# EAGLE board board_old (EAGLE 6.5.0)

Size 49.53 x 49.53 mm. Coordinates in mm from the lower left corner, seen from the top.
Outline: 0,0 49.53,0 49.53,49.53 0,49.53 0,0
Copper layers (1*16): Top 0.035mm / dielectric 1.5mm / Bottom 0.035mm
Design rules "default": minimum track width 10mil, minimum drill 24mil, track to track 8mil, track to pad 8mil, pad to pad 8mil, via to via 8mil, smd to smd 8mil, copper to edge 40mil, drill to drill 8mil, minimum pad ring 10mil, minimum via ring 8mil, stop-mask expansion 4mil, vias tented up to drill 0mil, thermal gap 10mil

## Footprints (pad centres in the part's own frame; a part is rotated, then mirrored left to right if it is on the bottom)
C1206 = smd 1.6 x 1.8: 1 -1.4,0; 2 1.4,0
E2-5 = drill 0.813 pad 1.27: + -1.016,0 | drill 0.813 pad 1.27 octagon: - 1.016,0
E5-10,5 = drill 1.016 pad 2.54: + -2.54,0 | drill 1.016 pad 2.54 octagon: - 2.54,0
E5-13 = drill 1.016 pad 2.54: + -2.54,0 | drill 1.016 pad 2.54 octagon: - 2.54,0
DO41-10 = drill 1.118: A 5.08,0; C -5.08,0
LED-1206 = smd 1.2 x 1.4: A -1.5,0; C 1.5,0
317TS = drill 1.016 long: 1 -2.54,-2.54; 2 0,-2.54; 3 2.54,-2.54
RTRIM3296W = drill 0.61: 1 0,-2.54; 2 0,0; 3 0,2.54
0309/10 = drill 0.813 octagon: 1 -5.08,0; 2 5.08,0
R1206 = smd 1.6 x 1.803: 1 -1.422,0; 2 1.422,0
W237-3E = drill 1.194 long: 1 -5.08,-0.635; 2 0,-0.635; 3 5.08,-0.635
W237-132 = drill 1.194 long: 1 -2.54,-0.635; 2 2.54,-0.635

## Placement (x,y rotation side)
C1  0.1u  [C1206]  17.78,38.1 90 top
C2  10u  [E2-5]  6.35,7.62 90 top
C3  1u  [C1206]  34.29,30.48 90 top
C4  220u  [E5-10,5]  11.43,27.94 270 top
C5  470u  [E5-13]  39.37,41.91 0 top
D1  1N4004  [DO41-10]  25.4,29.21 90 top
D2  [LED-1206]  24.13,44.45 180 top
IC1  [317TS]  38.1,13.97 0 top
R1  5k  [RTRIM3296W]  17.78,7.62 0 top
R2  500  [RTRIM3296W]  7.62,17.78 90 top
R3  240  [0309/10]  22.86,17.78 0 top
R4  3.9k  [R1206]  25.4,40.64 0 top
REG  [W237-3E]  38.1,7.62 0 top
VIN  [W237-132]  8.89,40.64 270 top
VOUT  [W237-132]  41.91,27.94 90 top

## Library data of the parts
C1-C5 R1-R4 = rcl
D1 = diode
D2 = SparkFun-LED
IC1 = v-reg
REG VIN VOUT = con-wago-508; OC_FARNELL: unknown; OC_NEWARK: unknown

## Nets
N$1: C1.1 C4.+ D1.C IC1.3 REG.3 VIN.2
N$2: D2.A R4.1
N$3: C2.+ IC1.1 R1.1 R1.2 R3.1 REG.1
N$4: R1.3 R2.1 R2.2
N$6: C3.1 C5.+ D1.A IC1.2 R3.2 R4.2 REG.2 VOUT.1
N$7: C1.2 C2.- C3.2 C4.- C5.- D2.C R2.3 VIN.1 VOUT.2

## Tracks (layer width: path | path; a pad name or v marks a point on that pad's centre or on a via)
N$1  (5 unrouted)
N$2  (1 unrouted)
N$3  (5 unrouted)
N$4  (2 unrouted)
N$6  (7 unrouted)
N$7  (8 unrouted)